# EAGLE board Diseño_Placa2 (EAGLE 9.7.0)
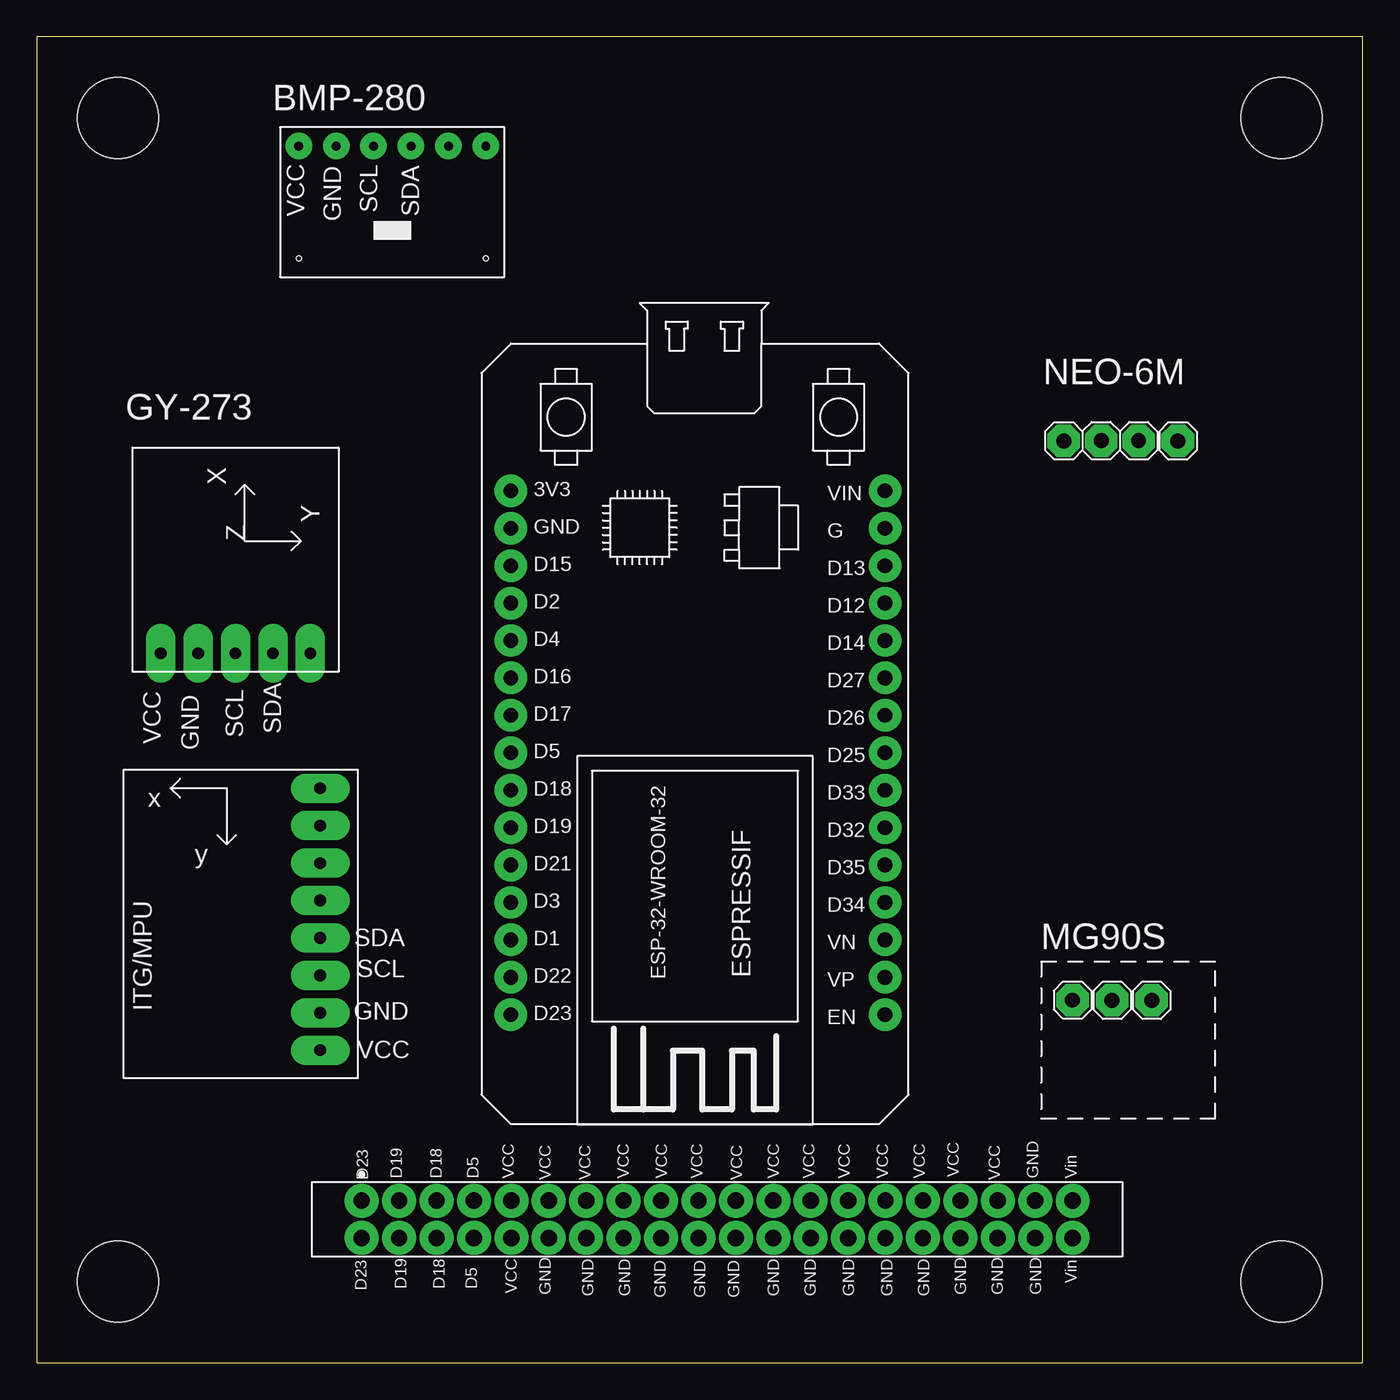
[diagram p0: board, top side]
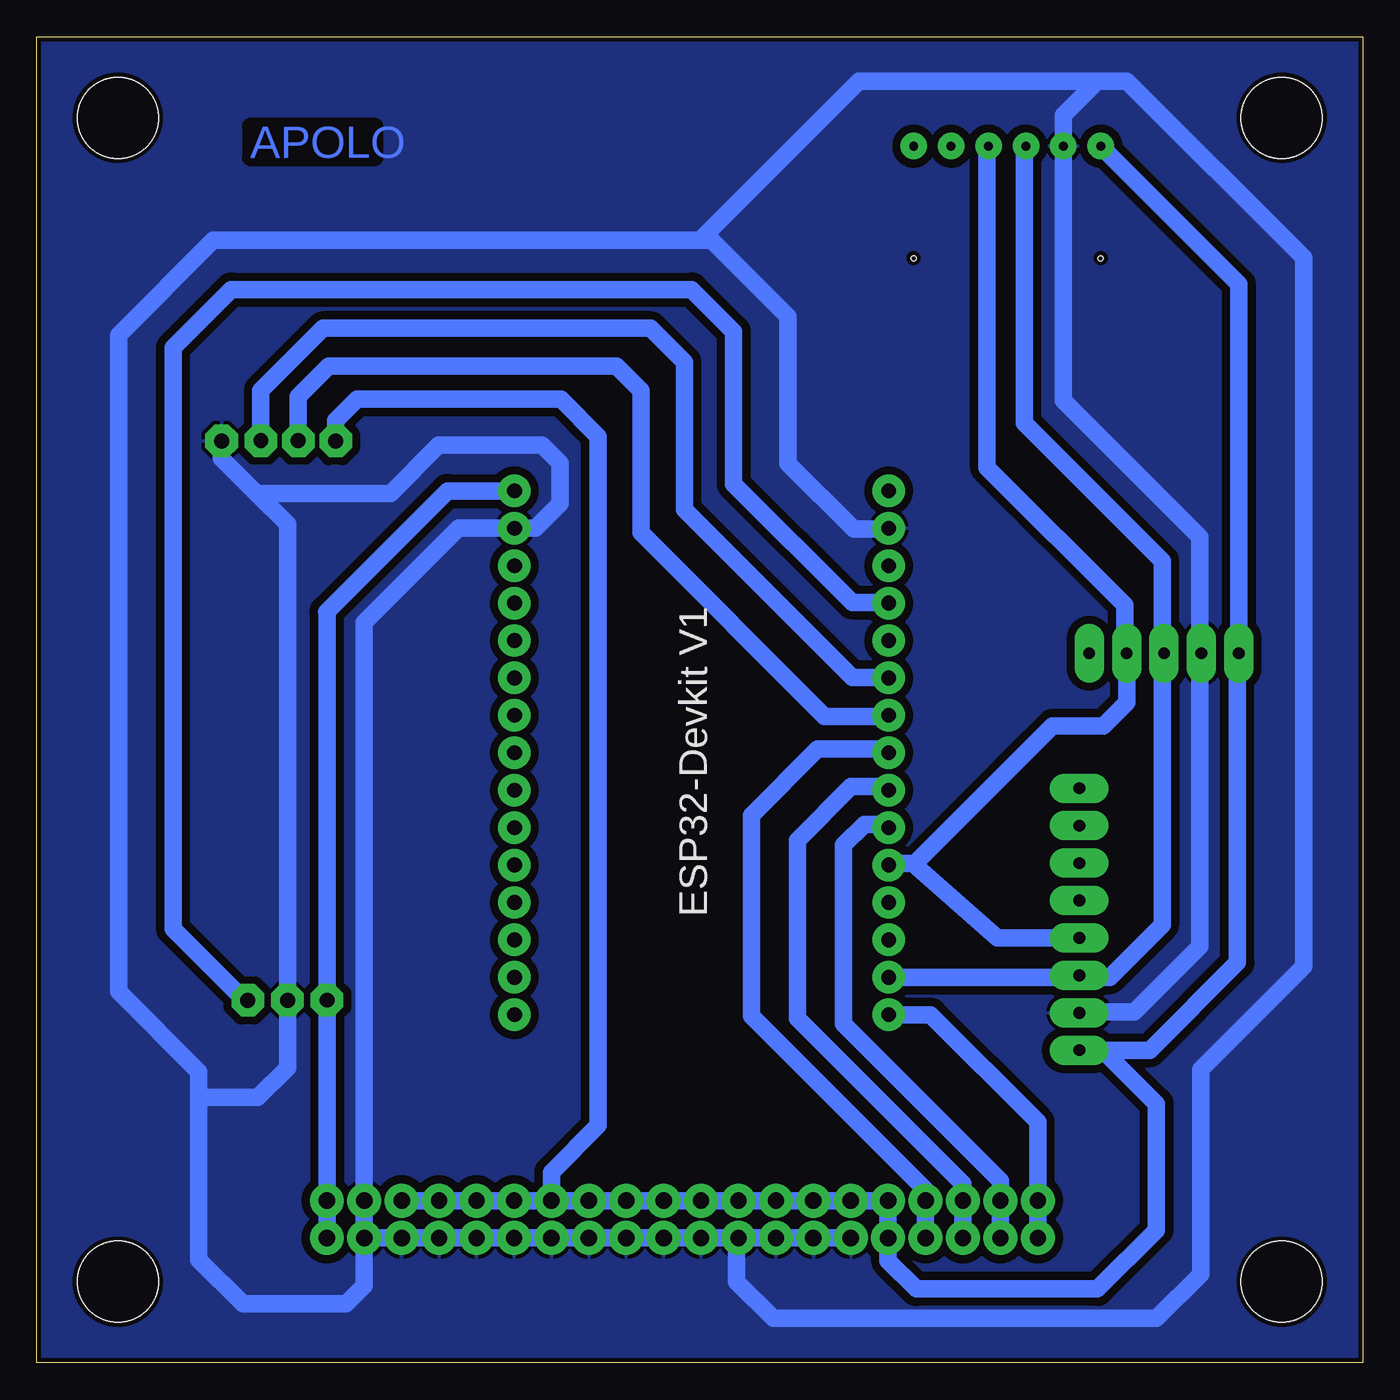
[diagram p1: board, bottom side, seen from below]

Size 90 x 90 mm. Coordinates in mm from the lower left corner, seen from the top.
Outline: 0,90 0,0 90,0 90,90 0,90
Copper layers (1*16): Top 0.035mm / dielectric 1.5mm / Bottom 0.035mm
Design rules "default *": minimum track width 1.2mm, minimum drill 0.35mm, track to track 0.55mm, track to pad 0.55mm, pad to pad 6mil, via to via 6mil, smd to smd 6mil, copper to edge 0.3mm, drill to drill 6mil, minimum pad ring 0.6mm, minimum via ring 8mil, stop-mask expansion 4mil, vias tented up to drill 0mil, thermal gap 10mil
Holes 5.5 mm at 5.5,84.5 84.5,84.5 5.5,5.5 84.5,5.5

## Footprints (pad centres in the part's own frame; a part is rotated, then mirrored left to right if it is on the bottom)
1X01 = drill 1.016 octagon: 1 0,0
ESP32-DEVKITV1 = drill 1 pad 1.93: 3V3 0,0; D1 30.48,0; D2 7.62,0; D3 27.94,0; D4 10.16,0; D5 17.78,0; D12 7.62,25.4; D13 5.08,25.4; D14 10.16,25.4; D15 5.08,0; D16 12.7,0; D17 15.24,0; D18 20.32,0; D19 22.86,0; D21 25.4,0; D22 33.02,0; D23 35.56,0; D25 17.78,25.4; D26 15.24,25.4; D27 12.7,25.4; D32 22.86,25.4; D33 20.32,25.4; D34 27.94,25.4; D35 25.4,25.4; EN 35.56,25.4; GND 2.54,25.4; GND@1 2.54,0; VIN 0,25.4; VN 30.48,25.4; VP 33.02,25.4
GY-271 = drill 0.8 long: DRDY -6.35,-4.445; GND -6.35,3.175; SCL -6.35,0.635; SDA -6.35,-1.905; VCC -6.35,5.715
GY-521 = drill 0.8 pad 1.778 long: ADO -8.89,-6.35; GND -8.89,6.35; INT -8.89,-8.89; SCL -8.89,3.81; SDA -8.89,1.27; VCC -8.89,8.89; XCL -8.89,-3.81; XDA -8.89,-1.27
GY-BMP280-FOOTPRINT = drill 0.6: CSB 11.43,0; GND 3.81,0; SCK 6.35,0; SDI 8.89,0; SDO 13.97,0; VCC 1.27,0 | hole 0.35: 1.27,7.62; 13.97,7.62
PINHEADER = drill 1.105 pad 1.705: 1 0,0; 2 2.54,0; 3 5.08,0; 4 7.62,0; 5 10.16,0; 6 12.7,0; 7 15.24,0; 8 17.78,0; 9 20.32,0; 10 22.86,0; 11 25.4,0; 12 27.94,0; 13 30.48,0; 14 33.02,0; 15 35.56,0; 16 38.1,0; 17 40.64,0; 18 43.18,0; 19 45.72,0; 20 48.26,0; 21 48.26,-2.54; 22 45.72,-2.54; 23 43.18,-2.54; 24 40.64,-2.54; 25 38.1,-2.54; 26 35.56,-2.54; 27 33.02,-2.54; 28 30.48,-2.54; 29 27.94,-2.54; 30 25.4,-2.54; 31 22.86,-2.54; 32 20.32,-2.54; 33 17.78,-2.54; 34 15.24,-2.54; 35 12.7,-2.54; 36 10.16,-2.54; 37 7.62,-2.54; 38 5.08,-2.54; 39 2.54,-2.54; 40 0,-2.54

## Placement (x,y rotation side)
3.3V  PWM  [1X01]  75.68,24.6 0 top
3.3V3  GND  [1X01]  77.46,62.57 0 top
3.3V4  VCC  [1X01]  69.71,62.57 0 top
BOARD1  ESP32DEVKITV1  [ESP32-DEVKITV1]  32.18,59.18 270 top
GND  VCC  [1X01]  70.3,24.61 0 top
GND3  TX  [1X01]  74.79,62.58 0 top
GY-271  HMC5883LGY-271  [GY-271]  14.12,54.51 90 top
PWM  GND  [1X01]  72.99,24.6 0 top
PWM3  RX  [1X01]  72.25,62.59 0 top
U1  GY-521MPU6050  [GY-521]  10.35,30.1 180 top
U$1  GY-BPM280  [GY-BMP280-FOOTPRINT]  31.75,82.58 180 top
U$3  PINHEADER  [PINHEADER]  22.05,11 0 top

## Library data of the parts
3.3V 3.3V3 3.3V4 GND GND3 PWM PWM3 = Connector; CATEGORY: Headers; DESCRIPTION: Header, Straight, 1 Position; MANUFACTURER: Generic; MPN: Generic; OPERATING_TEMPERATURE: Generic; PART_STATUS: Active; PITCH: 0.100" (2.54mm); ROHS_COMPLIANCE: Generic; SERIES: Generic; SUB-CATEGORY: Headers, Male Pins; TYPE: Board to Board or Cable, Unshrouded, Through Hole, Straight
BOARD1 = ESP32-DEVKITV1
GY-271 = hmc5883l
U1 = GY-521; AVAILABILITY: Not in stock; CHECK_PRICES: https://www.snapeda.com/parts/GY-521/GODREAM+FORDREAM+CO.%252C+LIMITED/view-part/?ref=eda; DESCRIPTION: Triple Axis Accelerometer Gyro Breakout; MF: GODREAM FORDREAM CO., LIMITED; MP: GY-521; PACKAGE: Package; PRICE: None; SNAPEDA_LINK: https://www.snapeda.com/parts/GY-521/GODREAM+FORDREAM+CO.%252C+LIMITED/view-part/?ref=snap
U$1 = GY-BMP280
U$3 = PINHEADER-40

## Nets
GND: 3.3V3.1 BOARD1.GND BOARD1.GND@1 GY-271.GND PWM.1 U1.GND U$1.CSB U$3.19 U$3.22 U$3.23 U$3.24 U$3.25 U$3.26 U$3.27 U$3.28 U$3.29 U$3.30 U$3.31 U$3.32 U$3.33 U$3.34 U$3.35
N$1: BOARD1.D17 PWM3.1
N$2: BOARD1.D16 GND3.1
N$3: 3.3V.1 BOARD1.D2
N$4: BOARD1.D22 GY-271.SCL U1.SCL U$1.SDI
N$5: BOARD1.D21 GY-271.SDA U1.SDA U$1.SCK
N$13: BOARD1.D23 U$3.1 U$3.40
N$14: BOARD1.D19 U$3.2 U$3.39
N$15: BOARD1.D18 U$3.3 U$3.38
N$16: BOARD1.D5 U$3.4 U$3.37
N$20: BOARD1.VIN GND.1 U$3.20 U$3.21
N$21: 3.3V4.1 GY-271.VCC U1.VCC U$1.SDO U$3.5 U$3.6 U$3.7 U$3.8 U$3.9 U$3.10 U$3.11 U$3.12 U$3.13 U$3.14 U$3.15 U$3.16 U$3.17 U$3.18 U$3.36

## Tracks (layer width: path | path; a pad name or v marks a point on that pad's centre or on a via)
GND
  Bottom 1.2: U1.GND 18.7,23.8 15.49,23.8 11.05,28.25 11.05,47.6 GY-271.GND 11.05,48.45 11.05,56.05 20.32,65.32 U$1.CSB 20.32,84.68 18,87 | 75.08,59 66,59 62.72,62.28 55.71,62.28 54.48,61.05 54.48,58.31 56.15,56.64 BOARD1.GND 61.36,56.64 67.77,50.23 U$3.19 U$3.22 | BOARD1.GND@1 32.24,56.58 34.55,56.58 39,61.03 39,71 44.19,76.19 45,76.19 | 45,76.19 78.01,76.19 84.45,69.75 84.45,25.2 79,19.75 79,18 | 75.08,59 72.99,56.91 PWM.1 72.99,20.01 75,18 79,18 | U$3.22 67.77,5.23 69,4 76,4 79,7 79,18 | 45,76.19 34.19,87 18,87 | 18,87 16,87 4,75 4,26.9 11,19.9 11,6 14,3 40,3 42.5,5.5 42.5,8.33 U$3.32 | U$3.35 U$3.34 U$3.33 U$3.32 | U$3.32 U$3.31 U$3.30 U$3.29 U$3.28 U$3.27 U$3.26 U$3.25 U$3.24 U$3.23 U$3.22 | 75.08,59 77.5,61.42 77.5,62.52 3.3V3.1
  pour Bottom: 0.08,0.08 89.92,0.08 89.92,89.92 0.08,89.92
N$1
  Bottom 1.2: BOARD1.D17 32.24,43.88 36.55,43.88 49,56.33 49,66 50.64,67.64 70.19,67.64 72.25,65.58 PWM3.1
N$2
  Bottom 1.2: BOARD1.D16 32.22,46.52 34.65,46.52 46.05,57.92 46.05,67.92 48.34,70.21 70.57,70.21 74.79,65.99 GND3.1
N$3
  Bottom 1.2: 3.3V.1 75.95,24.65 80.75,29.45 80.75,68.9 76.8,72.85 45.55,72.85 42.7,70 42.7,59.65 34.65,51.6 32.22,51.6 BOARD1.D2
N$4
  Bottom 1.2: BOARD1.D22 32.15,26.17 | U$1.SDI 22.95,82.45 22.95,63.77 13.6,54.42 13.6,48.45 GY-271.SCL 13.6,47.6 13.6,29.73 17.17,26.16 BOARD1.D22 | U1.SCL 19.37,26.16 BOARD1.D22
N$5
  Bottom 1.2: U$1.SCK 25.5,82.45 25.5,60.76 16.15,51.41 16.15,48.45 GY-271.SDA 16.02,44.8 17.6,43.23 21.06,43.23 30.4,33.89 30.52,33.89 | U1.SDA 24.78,28.83 30.52,33.89 | BOARD1.D21 32.07,33.89 30.52,33.89
N$13
  Bottom 1.2: U$3.40 U$3.1 22.05,16.34 29.33,23.62 BOARD1.D23
N$14
  Bottom 1.2: BOARD1.D19 32.3,36.55 33.84,36.55 35.25,35.13 35.25,23.01 24.59,12.35 U$3.2 U$3.39
N$15
  Bottom 1.2: BOARD1.D18 32.3,39.1 34.73,39.1 38.37,35.46 38.37,23.39 27.13,12.15 U$3.3 U$3.38
N$16
  Bottom 1.2: BOARD1.D5 32.3,41.65 36.99,41.65 41.5,37.15 41.5,23.54 29.67,11.72 U$3.37 U$3.4
N$20
  Bottom 1.2: BOARD1.VIN 62.12,59.18 70.33,50.97 70.3,50.94 GND.1 70.31,24.6 U$3.20 U$3.21
N$21
  Bottom 1.2: U$1.SDO 8.4,73.2 GY-271.VCC 8.5,47.6 8.5,27.16 14.45,21.21 U1.VCC 17.64,21.21 14,17.57 14,9 18,5 30.3,5 32.21,6.91 U$3.36 U$3.5 U$3.6 U$3.7 U$3.8 U$3.9 U$3.10 U$3.11 U$3.12 U$3.13 U$3.14 | U$3.14 55.07,12.93 51.89,16.11 51.89,62.87 54.42,65.4 68.26,65.4 69.71,63.95 3.3V4.1 | U$3.14 U$3.15 U$3.16 U$3.17 U$3.18

## Text on the board
Bottom: APOLO
tPlace: VCC | D23 | D19 | D18 | D5 | VCC | VCC | VCC | VCC | VCC | VCC | VCC | VCC | VCC | VCC | VCC | VCC | VCC | GND | Vin | D23 | D19 | D18 | D5 | VCC | GND | GND | GND | GND | Vin | GND | GND | GND | GND | GND | GND | GND | GND | GND | GND
tNames: BMP-280 | VCC | GND | SCL | SDA | NEO-6M | GY-273 | VCC | SCL | SDA | GND | SDA | MG90S | SCL | GND | VCC